# Allegro board Sensor_RevA3.brd
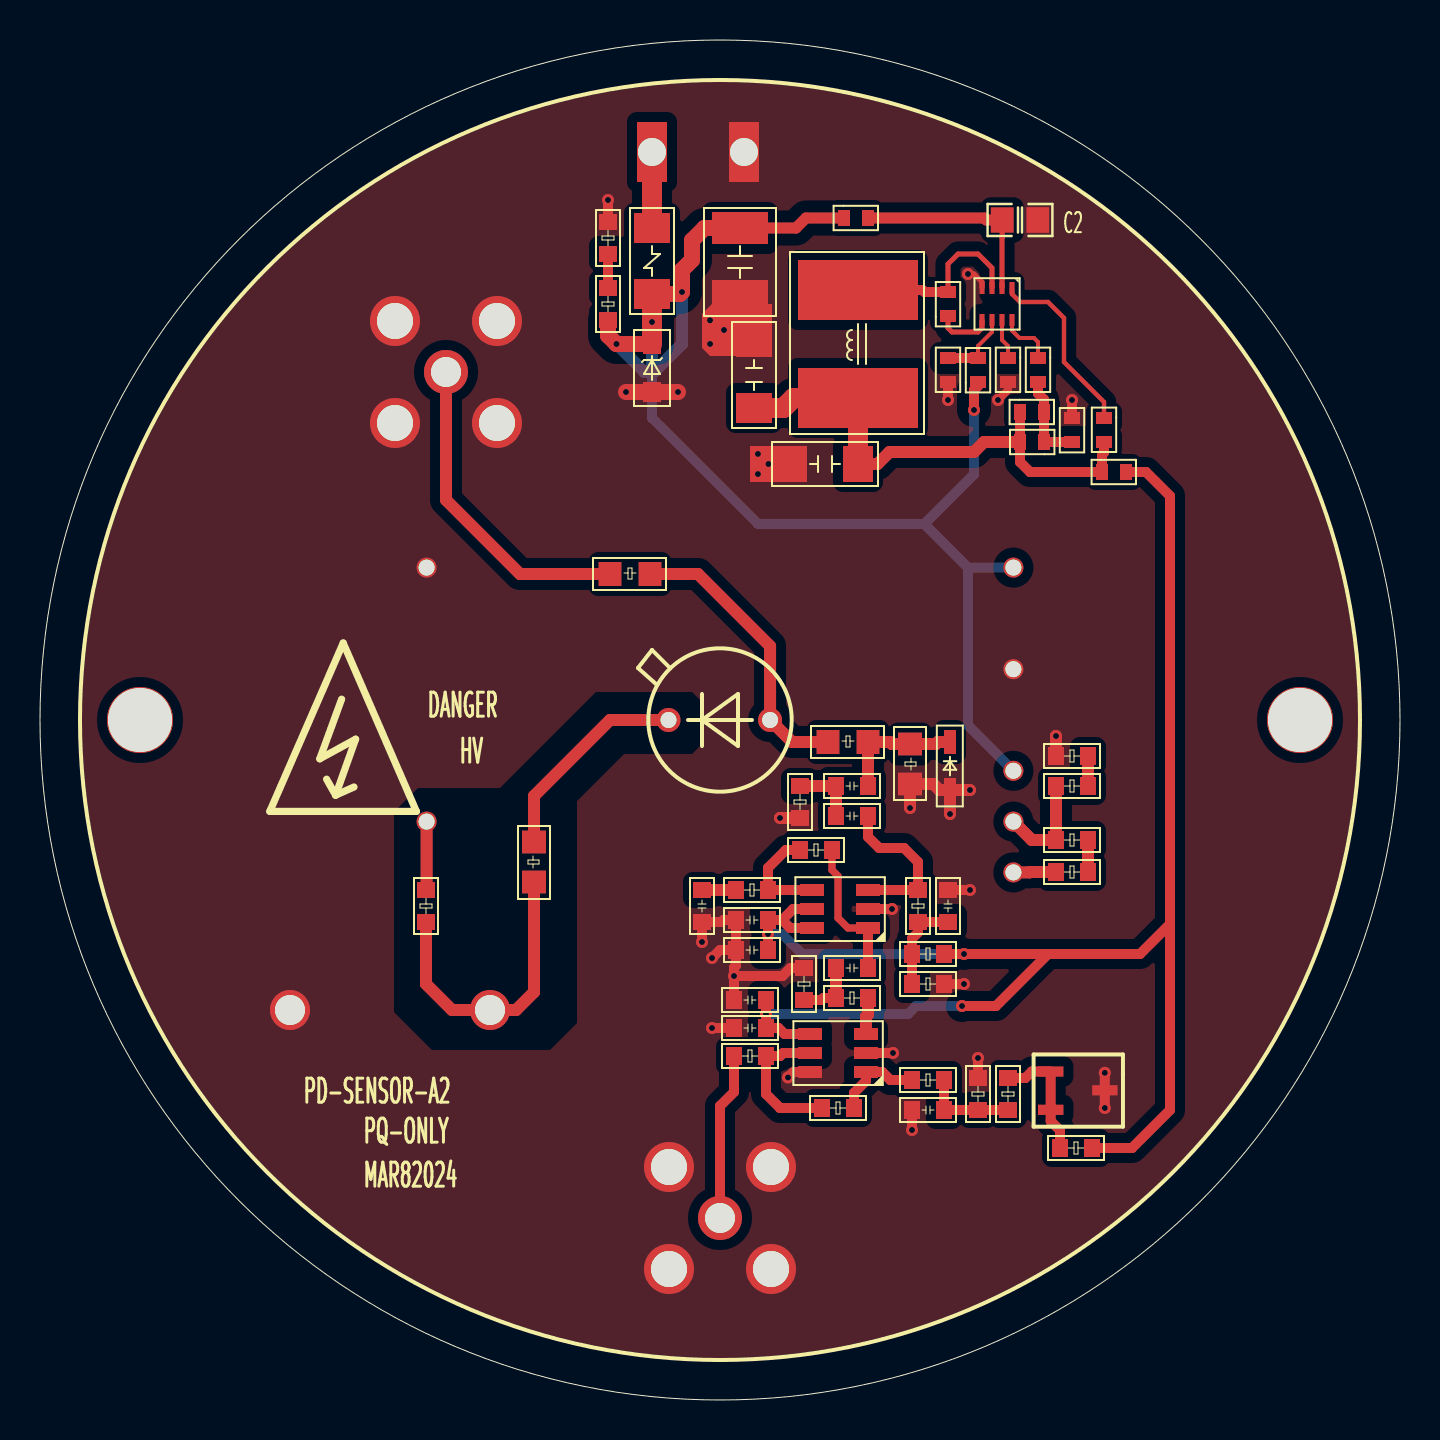
[diagram p0: board, top side]
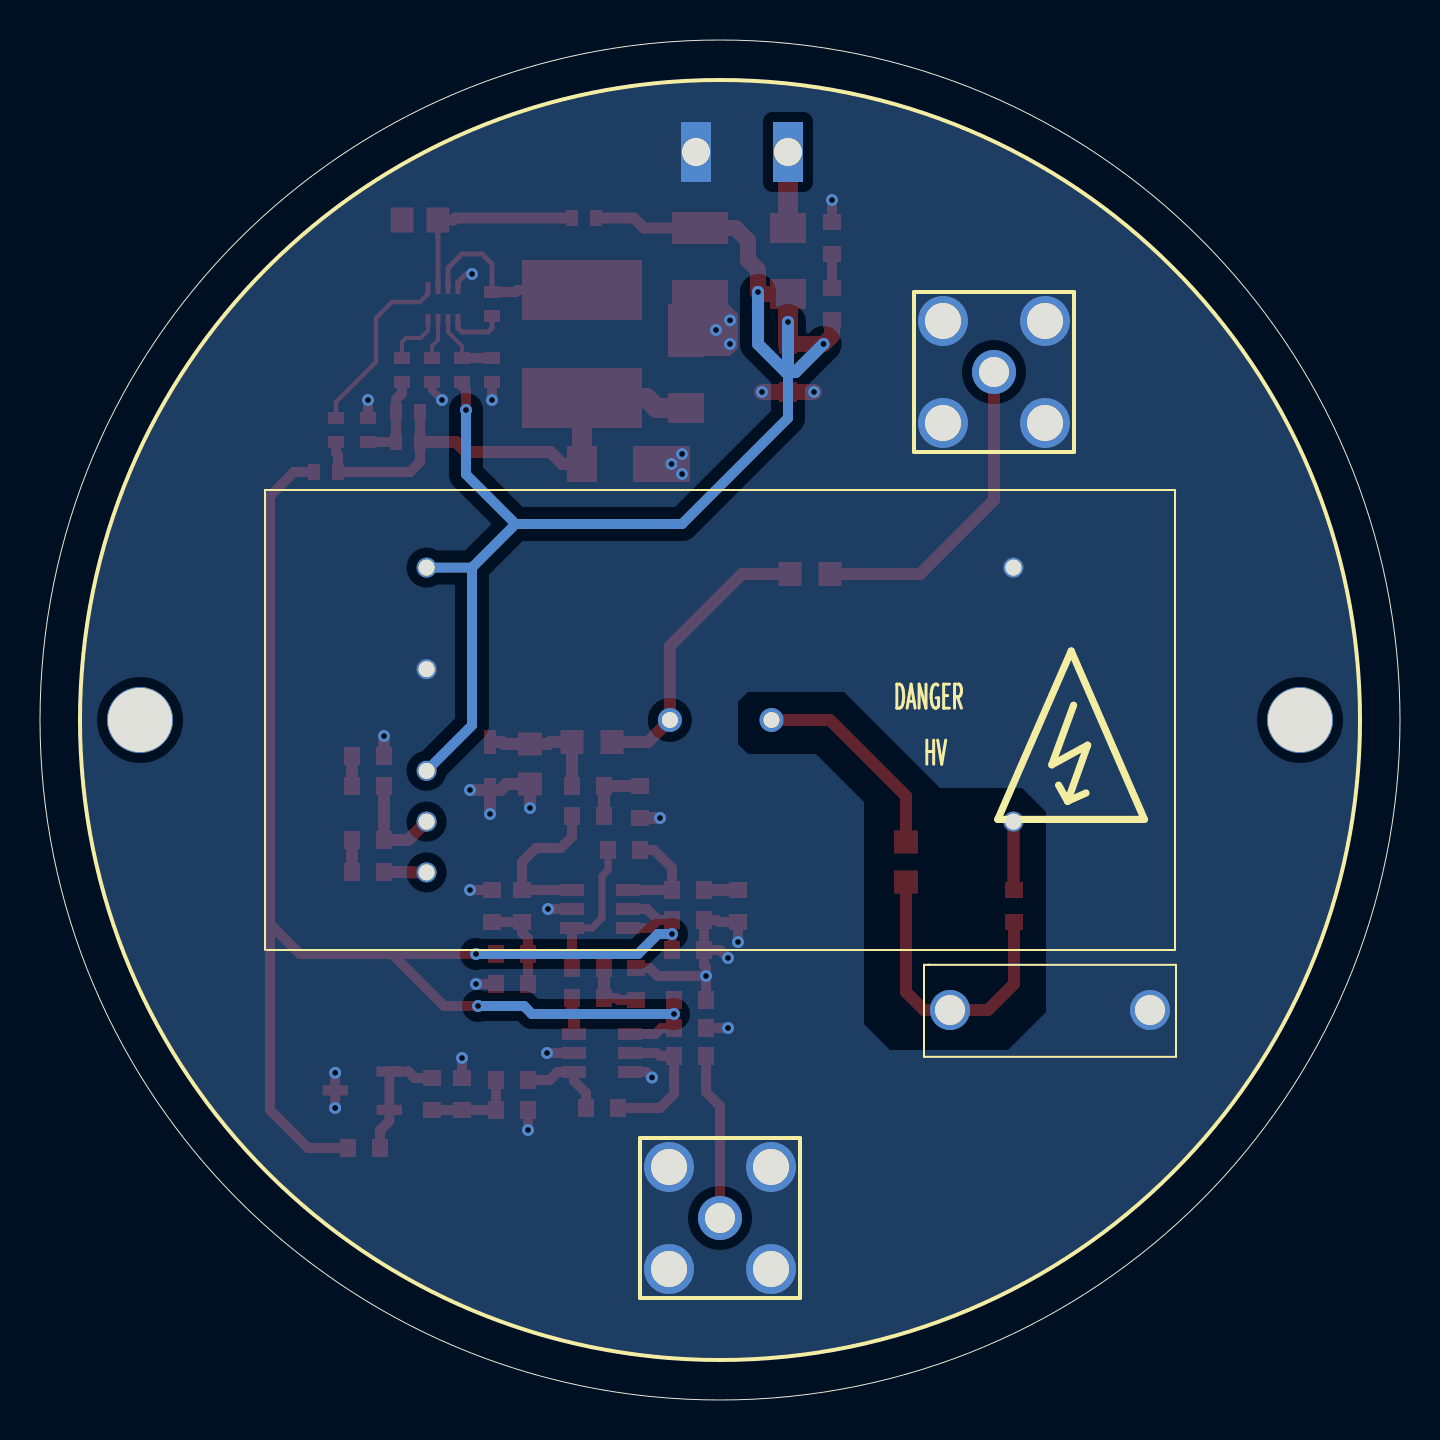
[diagram p1: board, bottom side, seen from below]

Outline 68 x 68 mm; copper layers: TOP, BOTTOM. Coordinates in mm from the lower left corner of the outline.
Outline path: circle c34,34 r34

## Design rules (mm)
constraint set DEFAULT: 

## Placement (name value [footprint] x y rotation side)
C1  22uF/25V  [C1210]  35 55.2 90 top
C2  0.1uF/50V  [C0805]  49 59 180 top
C3  100nF/25V  [C0402]  45.4 54.2 90 top
C4  22nF/25V  [C0402]  48.4 52.1 270 top
C5  22uF/10V  [C1206]  35.7 49.6 90 top
C6  300pF/6.3V  [C0402]  50.2 47.9 180 top
C7  22uF/10V  [C1206]  40.9 46.8 180 top
C8  0.1uF/16V  [C0603]  39.8 30.7 0 top
C9  0.1uF/16V  [C0603]  41.4 29.2 180 top
C10  0.1uF/16V  [C0603]  33.1 25.5 270 top
C11  0.1uF/16V  [C0603]  45.4 23.9 90 top
C12  10uF/16V  [C0603]  36.4 24 180 top
C13  0.1uF/16V  [C0603]  36.4 22.5 180 top
C14  0.1uF/16V  [C0603]  39.8 21.6 0 top
C15  0.1uF/16V  [C0603]  36.3 20 180 top
C16  10uF/16V  [C0603]  36.3 18.6 180 top
C17  0.1uF/16V  [C0603]  45.2 14.5 180 top
C18  0.1uF/630V  [MPP472J630V]  22.5 19.5 180 bottom
D1  LED  [R0603]  28.4 58.9 270 top
D2  PSD24-N  [SOD-323]  30.6 52.8 270 top
D3  SAPD  [SAPD-THR-2P]  34 34 180 top
D4  PTVSLC3D3V3B  [SOD323-L1D8-W1D3-P2D4-MM]  45.5 30.5 90 top
F1  24V/0.5A  [F1206]  30.6 58.6 270 top
J1  SMA  [SMA-THR-4P]  20.3 51.4 180 bottom
J2  SMA  [SMA-THR-4P]  34 9.1 90 bottom
L1  6.8uH/2A  [IND_SMD_6D0X6D0]  40.9 50.1 90 top
NOREF  -  [unnamed]  5 34 0 top
NOREF#2  -  [#2]  1.06 42.42 0 top
NOREF#3  -  [unnamed]  63 34 0 top
NOREF#4  -  [#2]  5 34 0 top
NOREF#5  -  [#2]  3.87 44.79 0 top
NOREF#6  -  [#2]  64.24 35.01 0 top
R1  0  [R0402]  40.2 59.1 0 top
R2  4.7K  [R0603]  28.4 54 90 top
R3  41.9K  [R0402]  45.4 52.1 270 top
R4  10K  [R0402]  49.9 52.1 270 top
R5  191K  [R0402]  46.9 50.9 90 top
R6  90.9K  [R0402]  49 49.4 0 top
R7  10K  [R0402]  51.6 47.9 90 top
R8  0  [R0402]  53.1 46.4 0 top
R9  100K  [R0402]  53.2 49.1 270 top
R10  0  [R0805]  30.5 41.3 180 top
R11  0  [R0805]  41.4 32.9 180 top
R12  0  [R0603]  50.8 32.2 0 top
R13  1.3K  [R0805]  43.5 30.8 90 top
R14  9.1K  [R0603]  52.4 30.7 180 top
R15  100K  [R0603]  38 30.7 270 top
R16  2.4K  [R0603]  52.4 28 180 top
R17  100K  [R0603]  39.6 27.5 180 top
R18  100K  [R0805]  24.7 27.9 270 top
R19  0  [R0603]  50.8 26.4 0 top
R20  10K  [R0603]  34.8 25.5 0 top
R21  100K  [R0603]  43.9 25.5 270 top
R22  2K  [R0603]  19.3 23.9 90 top
R23  4.99K  [R0603]  43.6 22.3 0 top
R24  100K  [R0603]  38.2 21.6 270 top
R25  4.99K  [R0603]  45.2 20.8 180 top
R26  0  [R0603]  41.4 20.1 180 top
R27  1K  [R0603]  36.3 17.2 180 top
R28  1K  [R0603]  43.6 16 0 top
R29  4.99K  [R0603]  46.9 14.5 90 top
R30  4.99K  [R0603]  48.4 16.1 270 top
R31  DNP  [R0603]  39.1 14.6 0 top
R32  499  [R0603]  52.6 12.6 180 top
TP1  12V  [STAMP_HOLE_1D5X3D0_1D4]  30.6 62.4 180 bottom
TP2  T POINT F  [STAMP_HOLE_1D5X3D0_1D4]  35.2 62.4 180 bottom
U1  MP2338GTL  [SOT583]  48.6 54 180 top
U2  OPA357AIDBVR  [SOT-23-6-L2D9-W1D6-PD0D95-CD2D8-MM]  41.4 23.6 180 top
U3  TLV3501AIDBVR  [SOT-23-6-L2D9-W1D6-PD0D95-CD2D8-MM]  41.3 16.4 180 top
U4  TL431  [SOT-23-3-TL431]  50.1 16.9 270 top
U5  -  [H01-P401V-5C]  34 34 180 bottom

## Library data of the parts
C1-C4 C6 C8-C17 = CAP NP
C5 C7 C18 = C
D1 = LED
D2 = DIODE TVS
D3 = DIODE
D4 = DIODE SCHOTTKY
F1 = FUSE
J1 J2 = SMA
L1 = INDUCTOR
R1-R32 = R
TP1 TP2 = T POINT F
U1 = MP2338GTL
U2 = OPA357AIDBVR
U3 = TLV3501AIDBVR
U4 = TL431/TI
U5 = H01-P401V-5C

## Footprints (pads in the part's own frame, mm; a bottom-side part is the same pattern mirrored in y, then rotated)
C0402
  rect 0.6x0.8 smd: 1(0,0) 2(1.2,0)
C0603
  rect 0.8x0.9 smd: 1(0,0) 2(1.6,0)
C0805
  rect 1.141x1.27 smd: 1(-0.889,0) 2(0.889,0)
C1206
  rect 1.5x1.8 smd: 1(0,0) 2(3.3,0)
C1210
  rect 1.6x2.8 smd: 1(0,0) 2(3.4,0)
F1206
  rect 1.5x1.8 smd: 1(0,0) 2(3.3,0)
H01-P401V-5C
  round 1 hole 0.8: 1(-14.67,7.62) 2(-14.67,2.54) 3(-14.67,-2.54) 4(-14.67,-5.08) 5(-14.67,-7.62) 6(14.67,-5.08) 7(14.67,7.62)
IND_SMD_6D0X6D0
  rect 3x6 smd: 1(0,0) 2(5.4,0)
MPP472J630V
  round 2 hole 1.5: 1(0,0) 2(10,0)
R0402
  rect 0.6x0.8 smd: 1(0,0) 2(1.2,0)
R0603
  rect 0.8x0.9 smd: 1(0,0) 2(1.6,0)
R0805
  rect 1.14x1.2 smd: 1(0,0) 2(2,0)
SAPD-THR-2P
  round 1.2 hole 0.8: 1(2.576,0) 2(-2.504,0)
SMA-THR-4P
  round 2.5 hole 1.8: 1(-2.55,2.55) 2(2.55,2.55) 3(-2.55,-2.55) 4(2.55,-2.55)
  round 2.2 hole 1.5: 5(0,0)
SOD323-L1D8-W1D3-P2D4-MM
  rect 1.2x0.6 smd: 1(0,0) 2(2.4,0)
SOD-323
  rect 1x0.9 smd: 1(0,0) 2(2.4,0)
SOT583
  rect 0.25x0.6 smd: 1(0,-1.6) 2(0.5,-1.6) 3(1,-1.6) 4(1.5,-1.6) 5(1.5,0) 6(1,0) 7(0.5,0) 8(0,0)
SOT-23-3-TL431
  rect 0.51x1.27 smd: 1(0.476,0.434) 2(1.415,3.142) 3(2.391,0.434)
SOT-23-6-L2D9-W1D6-PD0D95-CD2D8-MM
  rect 1.2x0.6 smd: 1(0,0) 2(0,-0.95) 3(0,-1.9) 4(2.8,-1.9) 5(2.8,-0.95) 6(2.8,0)
STAMP_HOLE_1D5X3D0_1D4
  rect 1.5x3 hole 1.4: 1(0,0)
unnamed
  round 3.3 hole 3.2 unplated: (0,0)

## Nets
2V5: R19.1 U5.5(VREF)
GND: C1.1 C2.1 C4.2 C5.2 C7.2 C10.2 C11.2 C12.2 C13.2 C15.2 C16.2 C17.2 C18.2 D1.1(CATHODE) D2.2 D4.1 J1.1 J1.2 J1.3 J1.4 J2.1 J2.2 J2.3 J2.4 R3.2 R7.2 R12.1 R13.1 R15.2 R24.1 R25.1 R29.2 TP2.1(TP) U1.4 U2.2(V-) U3.2(V-) U3.6 U4.2 U5.2 U5.7
VDD5: C12.1 C13.1 C15.1 C16.1 R8.2 R23.2 R32.1 U2.5 U2.6 U3.4
VDD12: C1.2 D2.1(CATHODE) F1.2 R1.1 R2.1 R5.1 U5.1 U5.3
VIN: F1.1 TP1.1(TP)
PULSE: J2.5 R27.2
VBIAS: C18.1 R18.2 R22.1
N371052: D3.2 R10.1 R11.2
N371268: C8.2 D4.2(CATHODE) R11.1 R13.2
N371666: C8.1 C9.2 R15.1
N371936: R27.1 R31.1 U3.5
N371974: C17.1 R28.2 R29.1 R30.2
N372070: R30.1 R32.2 U4.1(REF) U4.3
N379806: C11.1 R21.2 R23.1 R25.2
N380805: C9.1 R21.1 U2.3
N381019: R17.2 R20.2 U2.4
N381074: C14.2 R17.1 U2.1
N381200: C10.1 R20.1
N382559: C14.1 R24.2 R26.2
N382943: D3.1(K) R18.1
N497700: R28.1 R31.2 U3.1
N497855: R26.1 U3.3
N518424: R14.2 R16.2 U5.4
N518432: R22.2 U5.6
N518512: R16.1 R19.2
N518576: R12.2 R14.1
N796239: D1.2 R2.2
N797495: C3.1 U1.5
N797499: C3.2 L1.2 U1.3
N797507: C5.1 C6.2 C7.1 L1.1 R6.1 R8.1 R9.2
N797577: R3.1 R5.2 U1.6
N797711: C4.1 U1.7
N797719: R4.1 U1.8
N797723: C6.1 R4.2 R6.2 R7.1
N797843: R9.1 U1.1
N801076: C2.2 R1.2 U1.2(VIN)
N801913: J1.5 R10.2

## Via types
v1: diameter 0.6, hole 0.3, TOP to BOTTOM, 39 vias

## Routing (per net, layer and track width the routed paths; a pad name or vN(x,y) marks a point on that pad's centre or on a via; arc(x,y) is an arc through that point)
2V5: length 2.1
  TOP w0.6: R19.1 49.5,26.4 49.48,26.38 U5.5
GND: length 37.8
  TOP w0.25: v1(46.4,56.3) 46.7,56.3 47.1,55.9 U1.4
  TOP w0.38: v1(47.9,50) 48.4,50.5 C4.2
  TOP w0.5: C13.2 C12.2 34.17,24 34.07,23.9 C10.2 v1(33.1,22.9) ; C13.2 34,22.5 v1(33.6,22.1) ; C13.2 34.8,21.73 34.7,21.63 v1(34.7,21.2) ; R25.1 v1(46.2,20.8) ; R29.2 v1(46.9,17.1) ; U3.2 v1(42.65,17.35) ; v1(53.24,16.36) U4.2 v1(53.24,14.6) ; U3.6 37.67,16.4 v1(37.4,16.13) ; C11.2 v1(46.5,25.5) ; R24.1 37.52,21.6 37.12,21.2 v1(34.7,21.2) ; C16.2 v1(33.6,18.6) ; C15.2 v1(34.7,21.2) ; C17.2 v1(43.6,13.5) ; U2.2 v1(42.6,24.55) ; R3.2 v1(45.4,50) ; R7.2 v1(51.6,50) ; D1.1 v1(28.4,60)
  TOP w0.6: R15.2 v1(37,29.1) ; D4.1 v1(45.5,29.3) ; D4.1 44.97,30.5 44.67,30.8 R13.1 v1(43.5,29.6) ; D4.1 v1(46.5,30.5) ; R12.1 v1(50.8,33.2)
  TOP w0.8: v1(31.9,50.4) D2.2 v1(29.3,50.4)
  vias: v1(33.5,53.98) v1(33.5,52.8) v1(34.2,53.5) v1(35.9,47.3) v1(35.9,46.3) v1(36.42,46.8)
VDD5: length 84.9
  TOP w0.5: 50.4,22.3 47.8,19.7 v1(46.1,19.7) ; 50.4,22.3 v1(46.2,22.3) R23.2 ; 50.4,22.3 55,22.3 56.5,23.8 ; 56.5,23.8 56.5,14.5 54.6,12.6 R32.1 ; 56.5,23.8 56.5,45.2 55.3,46.4 R8.2 ; 37.11,24 C12.1 v1(36.4,23.3) C13.1 ; 37.11,24 37.66,24.55 U2.5 ; 37.11,24 37.51,23.6 U2.6 ; C15.1 v1(36.3,19.3) C16.1 36.93,18.6 37.23,18.3 U3.4
  BOTTOM w0.5: v1(36.4,23.3) 37.1,23.3 38.1,22.3 v1(46.2,22.3) ; v1(36.3,19.3) 43.4,19.3 43.8,19.7 v1(46.1,19.7)
VDD12: length 70.4
  TOP w0.5: R5.1 46.9,50.7 46.7,50.5 v1(46.7,49.5)
  TOP w0.55: R1.1 38.3,59.1 37.8,58.6 C1.2
  TOP w0.8: D2.1 v1(28.82,52.8) 28.4,53.22 R2.1 ; C1.2 33.22,58.6 32.6,57.98 32.6,57 32.1,56.5 v1(32.1,55.4) 32,55.3 F1.2
  TOP w1: D2.1 v1(30.6,53.9) F1.2
  BOTTOM w0.5: 44.22,43.8 35.9,43.8 30.6,49.1 30.6,51.4 ; 44.22,43.8 46.4,41.62 ; 44.22,43.8 46.7,46.28 v1(46.7,49.5) ; U5.1 46.4,41.62 ; 46.4,41.62 46.4,33.73 U5.3
  BOTTOM w0.6: v1(32.1,55.4) 32.1,52.8 30.7,51.4 30.6,51.4 ; v1(30.6,53.9) 30.6,51.4 ; 30.6,51.4 30.22,51.4 v1(28.82,52.8)
VIN: length 3.8
  TOP w1: F1.1 TP1.1
PULSE: length 8.4
  TOP w0.5: R27.2 34.7,15.4 34,14.7 J2.5
VBIAS: length 14.9
  TOP w0.6: R22.1 19.3,20.8 20.6,19.5 C18.1 23.81,19.5 24.7,20.39 R18.2
N371052: length 14.5
  TOP w0.6: R10.1 32.9,41.3 36.5,37.7 D3.2 37.6,32.9 R11.2
N371268: length 6.4
  TOP w0.6: C8.2 41.4,31.99 R11.1 42.49,32.9 42.59,32.8 R13.2 44.79,32.8 44.89,32.9 D4.2
N371666: length 3.3
  TOP w0.6: R15.1 C8.1 C9.2
N371936: length 7.3
  TOP w0.5: R31.1 37,14.6 36.3,15.3 R27.1 37.01,17.2 37.16,17.35 U3.5
N371974: length 4.7
  TOP w0.5: R30.2 R29.1 C17.1 R28.2
N372070: length 6.3
  TOP w0.5: R30.1 49.27,16.1 49.59,16.42 U4.1 U4.3 50.53,13.95 51,13.48 R32.2
N379806: length 4.7
  TOP w0.5: C11.1 44.72,23.9 44.72,23.9 R21.2 43.9,23.37 43.6,23.07 R23.1 R25.2
N380805: length 8
  TOP w0.5: C9.1 41.4,28.16 41.96,27.6 43.2,27.6 43.9,26.9 R21.1 U2.3
N381019: length 5.3
  TOP w0.5: U2.4 R20.2 36.4,26.61 37.29,27.5 R17.2
N381074: length 7.2
  TOP w0.36: R17.1 39.6,26.5 39.9,26.2 39.9,24.1 40.4,23.6 U2.1
  TOP w0.5: C14.2 U2.1
N381200: length 1.7
  TOP w0.6: C10.1 R20.1
N382559: length 3.1
  TOP w0.5: R24.2 39.07,20 39.17,20.1 R26.2
  TOP w0.6: C14.1 R26.2
N382943: length 10.6
  TOP w0.6: R18.1 24.7,30.2 28.5,34 D3.1
N497700: length 4.5
  TOP w0.5: R31.2 40.7,15.36 41.3,15.96 U3.1 42.12,16.4 42.52,16 R28.1
N497855: length 1.8
  TOP w0.6: R26.1 41.4,19.27 41.3,19.17 U3.3
N518424: length 5.2
  TOP w0.6: R14.2 R16.2 49.59,28 U5.4
N518432: length 3.4
  TOP w0.6: U5.6 19.33,25.53 R22.2
N518512: length 1.6
  TOP w0.6: R19.2 52.4,27.24 52.4,27.24 R16.1
N518576: length 1.5
  TOP w0.6: R14.1 R12.2
N796239: length 1.7
  TOP w0.5: R2.2 D1.2
N797495: length 2.9
  TOP w0.25: U1.5 47.1,53.6 46.9,53.4 45.6,53.4 45.4,53.6 C3.1
N797499: length 9.6
  TOP w0.25: C3.2 45.4,56.8 45.9,57.3 46.9,57.3 47.6,56.6 U1.3
  TOP w0.5: L1.2 44.13,55.5 44.23,55.4 C3.2
N797507: length 25.6
  TOP w0.5: R6.1 C6.2 49,46.9 49.5,46.4 R8.1 53.1,47.27 53.2,47.37 R9.2
  TOP w0.6: C6.2 47.2,47.9 46.7,47.4 42.48,47.4 41.88,46.8 C7.1
  TOP w1: C5.1 37.17,49.6 37.67,50.1 L1.1 C7.1
N797577: length 3.7
  TOP w0.2: R5.2 46.9,52.7 47.6,53.4 U1.6
  TOP w0.5: R3.1 R5.2
N797711: length 2
  TOP w0.2: U1.7 48.1,53 48.4,52.7 C4.1
N797719: length 2.9
  TOP w0.2: U1.8 48.6,53.47 48.97,53.1 49.7,53.1 49.9,52.9 R4.1
N797723: length 4.5
  TOP w0.5: R7.1 C6.1 R6.2 50.2,50.03 49.9,50.33 R4.2
N797843: length 9.2
  TOP w0.22: R9.1 53.2,49.9 51.2,51.9 51.2,54.1 50.4,54.9 49,54.9 48.6,55.3 U1.1
N801076: length 10.2
  TOP w0.25: C2.2 48.11,58.14 48.1,58.13 U1.2
  TOP w0.55: C2.2 47.31,59 47.21,59.1 R1.2
N801913: length 16.1
  TOP w0.6: J1.5 20.3,45 24,41.3 R10.2

## Copper pours and planes (outline as drawn; the poured copper is in the pictures)
GND on TOP (solid shape): 38.3,45.9 35.5,45.9 35.5,47.7 38.3,47.7
GND on TOP (solid shape): 36.6,52.2 33.5,52.2 33.1,52.6 33.1,54.3 33.6,54.8 36.6,54.8
GND on TOP: 2.1,34 65.9,34 ; 4 cut-outs
GND on BOTTOM: 2.1,34 65.9,34

## Text on the board
Ref Des/Silkscreen Bottom: HV | DANGER
Ref Des/Silkscreen Top: PD-SENSOR-A2 | PQ-ONLY | MAR82024 | DANGER | HV
XSECTION_CHART: *  SURFACE | L1 TOP CONDUCTOR | *  DIELECTRIC | L2 BOTTOM CONDUCTOR | DESIGN CROSS SECTION CHART | ___________________________ | TOTAL THICKNESS 0.86096 MM | 1-2
DIMENSION: FIGURE | FINISHED_SIZE | 0.3 | 0.8 | 1.4 | 1.5 | 1.8 | 3.2 | DRILL CHART: TOP to BOTTOM | ALL UNITS ARE IN MILLIMETERS | PLATED | NON-PLATED | QTY | 39 | 2 | 7 | 8
